# EAGLE board STorM32 NT splitter v10 (EAGLE 6.5.0)
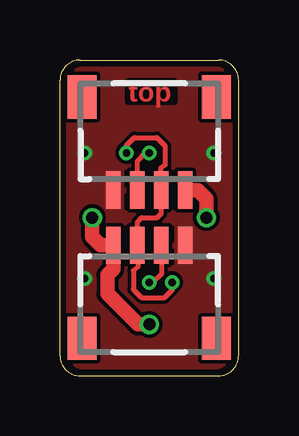
[diagram p0: board, top side]
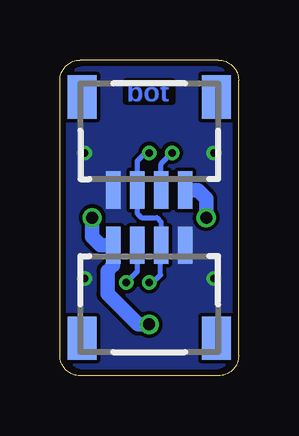
[diagram p1: board, bottom side, seen from below]

Size 7.46 x 13.16 mm. Coordinates in mm from the lower left corner, seen from the top.
Outline: 0.84,13.16 6.62,13.16 arc-90 7.46,12.32 7.46,0.84 arc-90 6.62,0 0.84,0 arc-90 0,0.84 0,12.32 arc-90 0.84,13.16
Copper layers (1*16): Top 0.035mm / dielectric 1.5mm / Bottom 0.035mm
Design rules "Fusion_eagle_rule_v1.1-shapes-supply-changed": minimum track width 6mil, minimum drill 12mil, track to track 6mil, track to pad 6mil, pad to pad 6mil, via to via 6mil, smd to smd 0mil, copper to edge 10mil, drill to drill 10mil, minimum pad ring 10mil, minimum via ring 6mil, stop-mask expansion 2mil, vias tented up to drill 100mil, thermal gap 6mil

## Footprints (pad centres in the part's own frame; a part is rotated, then mirrored left to right if it is on the bottom)
SM04B-SRSS-TB = smd 0.6 x 1.55: 1 -1.5,2.975; 2 -0.5,2.975; 3 0.5,2.975; 4 1.5,2.975 | smd 1.2 x 1.8: FIT@1 -2.8,-0.9; FIT@2 2.8,-0.9

## Placement (x,y rotation side)
NTX  NTX  [SM04B-SRSS-TB]  3.73,2.46 0 top
NTX1  NTX  [SM04B-SRSS-TB]  3.73,10.72 180 bottom
NTX2  NTX  [SM04B-SRSS-TB]  3.73,2.46 0 bottom
NTX3  NTX  [SM04B-SRSS-TB]  3.73,10.72 180 top

## Library data of the parts
NTX NTX1-NTX3 = con-jst2

## Nets
5V: NTX1.1 NTX2.1 NTX3.1 NTX.1
GND: NTX1.4 NTX2.4 NTX3.4 NTX.4
RX: NTX1.2 NTX2.2 NTX3.2 NTX.2
TX: NTX1.3 NTX2.3 NTX3.3 NTX.3

## Tracks (layer width: path | path; a pad name or v marks a point on that pad's centre or on a via)
5V  (via drill 0.5)
  Top 0.61: v1.35,6.59 1.35,5.79 1.71,5.44 NTX.1 2.23,4.45 1.98,4.21 1.98,3.41 3.25,2.14 v3.73,2.14 | NTX3.1 5.75,7.74 6.11,7.38 v6.11,6.59
  Bottom 0.61: v1.35,6.59 1.35,7.38 1.71,7.74 NTX1.1 | v6.11,6.59 6.11,5.79 5.75,5.44 NTX2.1 5.23,4.61 5.48,4.37 5.48,3.41 4.21,2.14 v3.73,2.14
GND  (via drill 0.3)
  other vias: 1.03,4.05 6.43,4.05 1.03,9.29 6.43,9.29
  pour Bottom (isolate 0.152): 0.33,12.16 arc-90 1,12.83 6.46,12.83 arc-90 7.13,12.16 7.13,1 arc-90 6.46,0.33 1,0.33 arc-90 0.33,1
  pour Top (isolate 0.152): 0.33,12.16 arc-90 1,12.83 6.46,12.83 arc-90 7.13,12.16 7.13,1 arc-90 6.46,0.33 1,0.33 arc-90 0.33,1
  pour Top (no thermals): 4.84,6.43 5.87,6.43 5.87,4.21 4.84,4.21
  pour Top (no thermals): 2.62,8.81 2.62,6.59 1.67,6.59 1.67,8.81
  pour Bottom (no thermals): 4.76,8.81 4.76,6.59 5.79,6.59 5.79,8.81
  pour Bottom (no thermals): 1.59,6.59 2.7,6.59 2.7,3.97 1.59,3.97
RX  (via drill 0.3)
  Top 0.203: v2.78,9.29 2.78,9.6 3.1,9.92 4.05,9.92 4.39,9.58 4.39,8.79 4.21,8.65 NTX3.2 4.23,6.77 4.05,6.59 3.41,6.59 3.23,6.41 NTX.2 3.25,4.52 3.07,4.39 3.07,3.6 3.41,3.25 4.37,3.25 4.68,3.57 v4.68,3.89
  Bottom 0.203: NTX1.2 3.23,8.83 v2.78,9.29 | NTX2.2 4.23,4.34 v4.68,3.89
TX  (via drill 0.3)
  Top 0.203: NTX.3 4.23,4.23 3.89,3.89 v3.73,3.89 | NTX3.3 3.23,8.95 3.57,9.29 v3.73,9.29
  Bottom 0.203: v3.73,3.89 3.57,3.89 3.25,4.21 3.25,5.41 NTX2.3 3.23,6.41 3.41,6.59 4.05,6.59 4.23,6.77 NTX1.3 4.23,8.95 3.89,9.29 v3.73,9.29

## Text on the board
Top: top
Bottom: bot